# Altium PCB OBC_v8.PcbDoc (part 2 of 3)
Units mil, origin at the board's own origin, x right, y up, seen from the top; angles counter-clockwise.
Board outline 3550 x 3775 mil, 6 copper layers (Top Layer, MidLayer1, GND, Power, MidLayer2, Bottom Layer); 109 components, 228 nets, 761 pads, 520 vias.
Unrouted connection lines stored in the file: 5.
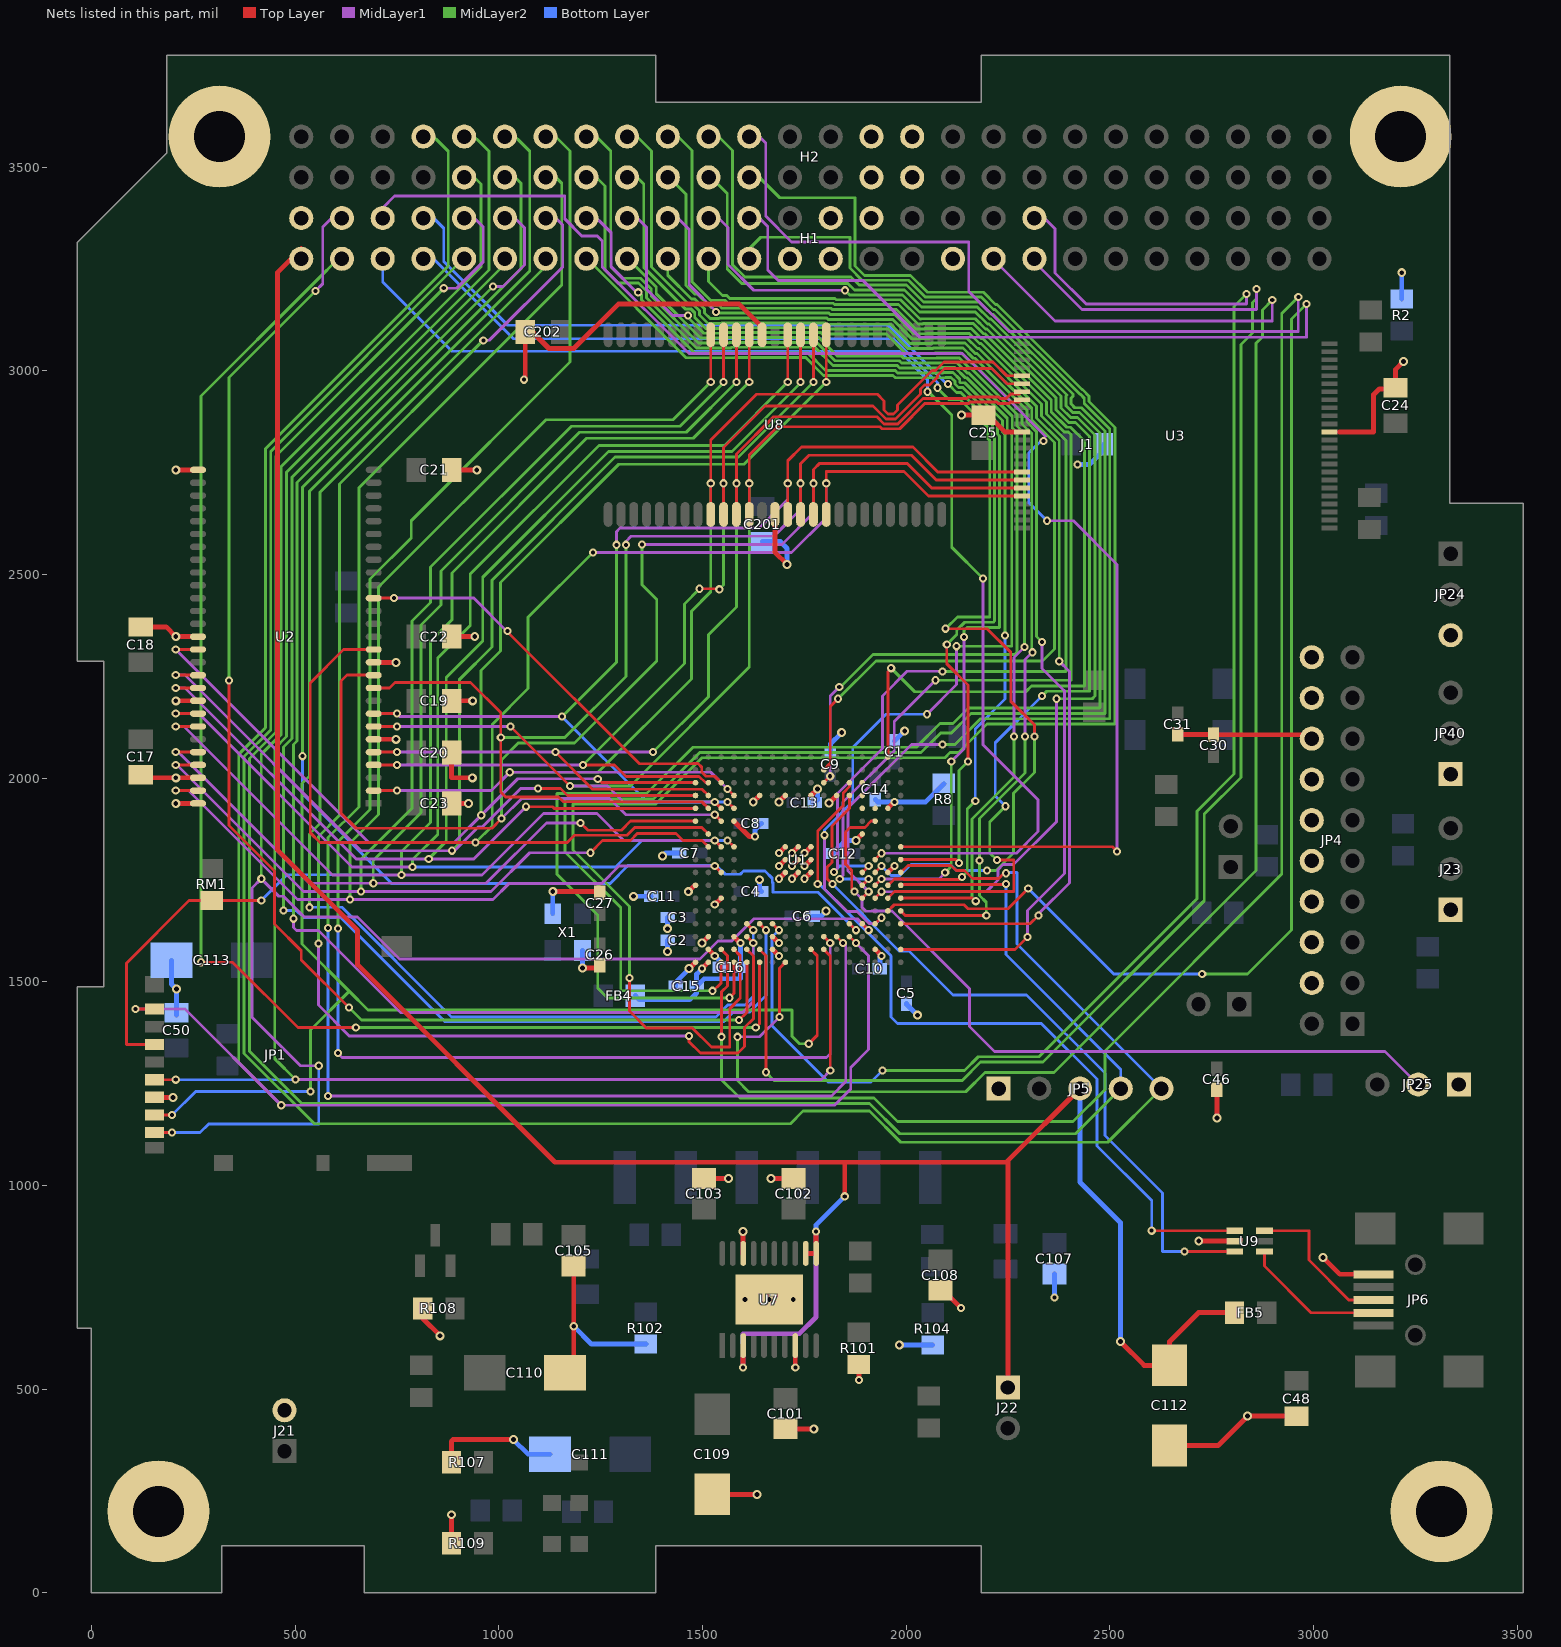
[diagram p6: the nets of this part, all layers, seen from the top]

## Via types
v1: diameter 20, hole 10, Top Layer to Bottom Layer, 405 vias
v2: diameter 22, hole 12, Top Layer to Bottom Layer, 93 vias
v3: diameter 20, hole 10, Top Layer to MidLayer1, 22 vias

## Nets (pads, with @x,y where several pads share a name; then routed paths per layer and width w, separated by ;. In a path a pad name is that pad's centre, name@x,y a point inside that pad or via, vN(x,y) a via of type N, cw(c..) or ccw(c..) an arc to the next point about the centre after c; other vN are vias at no path point) (continued)
AGND: C1.1 C2.1 C3.1 C4.1 C5.1 C6.1 C7.1 C8.1 C9.1 C10.1 C11.1 C12.1 C13.1 C14.1 C15.1 C16.1 C17.1 C18.1 C19.1 C20.1 C21.1 C22.1 C23.1 C24.2 C25.1 C26.1 C27.1 C30.1 C31.1 C46.1 C48.1 C50.1 C101.2 C102.2 C103.2 C105.1 C107.1 C108.1 C109.2 C110.2 C111.2 C112.2 C113.2 C201.2 C202.1 H1.2 H1.30 H2.29 H2.30 H2.31 H2.32 J1.2 J21.2 J23.1 JP1.6 JP4.4 JP4.6 JP4.8 JP4.10 JP4.12 JP4.14 JP4.16 JP4.18 JP4.20 JP5.1 JP6.5 JP24.3 JP25.1 JP40.1 pad.1 pad.2 pad.3 pad.4 R2.1 R8.1 R101.1 R102.1 R104.1 R107.1 R108.1 R109.1 U1.D6 U1.D8 U1.D10 U1.D12 U1.E16 U1.F4 U1.G14 U1.H8 U1.H9 U1.H10 U1.J8 U1.J9 U1.J10 U1.K8 U1.K9 U1.K10 U1.K16 U1.L1 U1.M3 U1.R2 U1.R7 U1.T2 U1.T7 U1.T15 U1.U1 U2.6 U2.12 U2.28 U2.41 U2.46 U2.52 U2.54 U3.13 U3.36 U7.8 U7.18 U7.21 U8.14 U8.42 U9.GND X1.2 X1.4 | length 6989.8
  Top Layer w12: C18.1@121,2371.31 183.14,2371.31 v2(207,2347.45) U2.41@261.5,2347.45 ; C17.1@124,2008.69 131.7,2000.99 v2(207,2000.99) U2.52@261.5,2000.99 ; JP1.6@155,1216.46 v2(200,1216.47) ; v2(207,1938) U2.54@261.5,1938 ; v2(207,2189.97) U2.46@261.5,2189.97 ; v2(207,2756.9) U2.28@261.5,2756.9 ; U2.6@693,2095.48 v2(748,2095.48) ; U2.12@693,2284.46 v2(748,2284.46) ; R108.1@813.63,698 813.63,673.37 v2(856,631) ; R109.1@883.63,122 v2(883.63,191.63) v2@884,192 ; R107.1@883.63,320 883.63,371.63 888,376 v2(1036,376) ; C23.1@884.31,1938 v2(926,1938) ; C20.1@884.31,2062.99 884.31,2000.99 v2(935,2000.99) ; C19.1@884.31,2189.97 v2(936,2189.97) ; C22.1@884.31,2347.45 v2(941,2347.45) ; C21.1@884.31,2756.9 v2@946,2756.9 ; v1@1064.96,2981.3 C202.1@1064.96,3095.47 1082.87,3095.47 1123.4,3054.94 1184.47,3054.94 1293.36,3163.84 1590.19,3163.84 1646.5,3107.53 U8.42@1646.5,3088.47 U8.42@1648.03,3090 ; v2(1132.58,1721.58) 1245.01,1721.58 C27.1@1248,1718.59 ; C110.2@1162.43,540 C110.2@1184.59,560.96 ; C110.2@1184,561.57 v1(1184,654.41) C105.1@1184,802.6 ; v2(1205.42,1533.58) 1241.17,1533.58 C26.1@1248,1540.41 ; v2(1465.28,1721.26) 1481.03,1737.01 U1.L1@1483.03,1737.01 ; v2(1467.28,1532.28) U1.U1@1483.03,1548.03 ; v2(1498.78,1595.28) U1.R2@1514.53,1611.02 ; C103.2@1504,1017.4 v2@1564,1017.4 ; U1.T2@1514.53,1579.53 v1(1530.28,1563.78) ; C109.2@1524,241.57 v2(1633.57,241.57) ; v1(1530.28,1689.76) U1.M3@1546.02,1705.51 ; U1.F4@1577.52,1894.49 1615.27,1856.74 v1(1629.27,1856.74) ; U7.18@1600.02,833.19 v2(1600.02,887) ; v2(1624.76,1941.73) U1.D6@1640.51,1957.48 ; v2(1668.4,1017.4) C102.2@1724,1017.4 ; U1.T7@1672.01,1579.53 v1(1687.76,1563.78) ; U1.R7@1672.01,1611.02 v1(1687.76,1595.28) ; U8.14@1678,2647.53 1678,2555 v2(1708,2525) ; v2(1687.76,1941.73) U1.D8@1703.5,1957.48 ; v1(1688.01,1753.01) U1.K8@1703.5,1768.5 ; v1(1688.01,1784) 1688.01,1784.5 U1.J8@1703.5,1800 ; v1(1688.01,1816) U1.H8@1703.5,1831.5 ; C101.2@1704,402.6 v2(1773.4,402.6) ; v1(1720.01,1753.01) 1720.01,1753.51 U1.K9@1735,1768.5 ; v1(1720.01,1784) 1720.01,1785.01 U1.J9@1735,1800 ; v1(1720.01,1816) 1720.01,1816.5 U1.H9@1735,1831.5 ; v1(1728,553) U7.8@1727.98,606.81 ; v1(1751,1753.01) U1.K10@1766.5,1768.5 ; v1(1751,1784.5) U1.J10@1766.5,1800 ; v1(1751,1816) U1.H10@1766.5,1831.5 ; U1.D10@1766.5,1957.48 v2(1782.24,1973.23) ; v2(1810.74,1938.73) U1.D12@1829.49,1957.48 ; v2(1876.73,1847.24) U1.G14@1892.48,1862.99 ; v1(1884,522) R101.1@1884,560.63 R101.1@1884,574.41 ; U1.T15@1923.98,1579.53 v1(1939.72,1563.78) ; U1.K16@1955.47,1768.5 v1(1971.22,1784.25) ; U1.E16@1955.47,1925.98 v1(1971.22,1941.73) ; C108.1@2084,742.6 2091.4,742.6 v1(2135,699) ; v2(2136,2891.31) C25.1@2190,2891.31 ; C25.1@2197,2883.59 2209,2883.59 2242.37,2850.22 U3.36@2284.09,2850.22 ; C112.2@2647,361.57 2766.19,361.57 v2(2838.31,433.69) C48.1@2959,433.69 ; C31.1@2667,2107.41 C30.1@2751.18,2107.41 ; v2(2718.59,863.41) U9.GND@2807,863.41 ; C30.1@2755,2106.59 2986.41,2106.59 JP4.16@2996,2097 ; v2(2763,1166) C46.1@2763,1235.41 ; v2(3024,823) 3065.02,781.98 JP6.5@3148,781.98 ; 3064,2850.22 3148,2850.22 3148,2942 3161.59,2955.59 C24.2@3188,2955.59 ; C24.2@3202,2958.31 3202,3004 v2(3221,3023)
  Bottom Layer w12: C113.2@196.57,1553 196.57,1494.43 v2(209,1482) C50.1@209,1424.31 C50.1@209,1418.59 ; v2(1036,376) 1072,340 C111.2@1125.57,340 ; X1.4@1132.58,1667.28 v2(1132.58,1721.58) ; v1(1184,654.41) 1227.78,610.63 R102.1@1361,610.63 ; v2(1205.42,1533.58) X1.2@1205.42,1576.72 ; v2(1331,1710) C11.1@1374.41,1710 ; v2(1402,1809) 1409,1816 C7.1@1443.41,1816 ; v2(1414.41,1574.41) C2.1@1414.41,1602 ; v2(1414.41,1630.41) C3.1@1414.41,1658 ; C2.1@1416.41,1602 C2.1@1416.41,1605 ; C15.1@1434.41,1489 1434.41,1499.41 v2(1467.28,1532.28) ; v1(1530.28,1563.78) 1542.41,1551.65 C16.1@1542.41,1536 ; v1(1629.27,1856.74) 1629.27,1873.68 C8.1@1644.59,1889 ; v2(1640.59,1750.59) 1640.59,1726 C4.1@1644.59,1722 ; C201.2@1647,2580.69 1691.31,2580.69 1708,2564 v2(1708,2525) ; C6.1@1770.59,1661 1791,1661 1803,1673 v2(1803,1674) ; C13.1@1775.59,1940 1782.24,1946.65 v2(1782.24,1973.23) ; C9.1@1814,2059.59 1814,2084 v2(1842,2112) ; C12.1@1819.41,1815 1851.65,1847.24 v2(1876.73,1847.24) ; C14.1@1924.18,1947.64 1930.09,1941.73 v1(1971.22,1941.73) 2048.36,1941.73 R8.1@2093,1986.37 ; C10.1@1935.59,1532 1935.59,1559.65 v1(1939.72,1563.78) ; C1.1@1971.22,2090.59 v2(1996.63,2116) ; v2(1983.37,608.63) R104.1@2065,608.63 ; C5.1@2001,1446.41 2001,1445 v2(2028,1418) ; v1(2364,725) C107.1@2364,782.6 ; v1(2421,2770) 2450,2770 2484.37,2804.37 J1.2@2484.37,2819.85 ; JP4.4@2979,1480 JP4.4@2996,1497 ; R2.1@3217,3176.37 v2(3217,3241)
  other v1: 1062.01,2978.35
  other v2: 1604.94,720 1664,720 1723.06,720 1564,1017 946,2757
AVDD: C15.2 C16.2 FB4.2 U1.R4 U1.U2 | length 474.3
  Top Layer w12: v1(1498.78,1532.28) U1.U2@1514.53,1548.03 ; U1.R4@1577.52,1611.02 v1(1593.27,1595.28)
  Bottom Layer w12: FB4.2@1335.37,1466 1345.37,1456 1469,1456 1485.59,1472.59 C15.2@1485.59,1489 ; v1(1498.78,1532.28) 1485.59,1519.09 C15.2@1485.59,1489 ; C16.2@1593.27,1536 v1(1593.27,1595.28) ; C16.2@1593.59,1536 1593.59,1507.59 1504.18,1507.59 C15.2@1485.59,1489
AVDD33: 
BMS: JP25.2 U1.F15 | length 1886.7
  Top Layer w7: v1(1873,1722) 1866.74,1728.26 1866.74,1772.97 1851,1788.71 1851,1868 1862.1,1879.1 1898.85,1879.1 1914.24,1894.49 U1.F15@1923.98,1894.49 U1.F15@1923.98,1894.98
  MidLayer1 w7: v1(1873,1722) 1891.73,1703.27 1891.73,1682.93 1901.39,1673.26 1915.06,1673.26 1915.57,1673.77 1965.23,1673.77 2156,1483 2156,1390 2217,1329 3176,1329 JP25.2@3257,1248
CAS: U1.C3 U2.17 | length 1047.9
  Top Layer w7: U2.17@693,2441.94 v1(743,2441.94) ; v1@1020.5,2360.5 1345.4,2035.6 1476.4,2035.6 1476.66,2035.86 1489.41,2035.86 1498.42,2026.85 1498.42,2014.81 1508.51,2004.72 1530.28,2004.72 U1.C3@1546.02,1988.98
  MidLayer1 w7: v1(743,2441.94) 939.06,2441.94 v1@1020.5,2360.5
  other v1: 1021,2361
"CTS MHX": H1.35 U1.U8 | length 4122.5
  Top Layer w7: v1(1689,1414) 1689,1533.53 U1.U8@1703.5,1548.03
  MidLayer1 w7: v1(1586,1365) 1640,1365 v1(1689,1414) ; H1.35@2215,3300 2215,3273.19 2365.69,3122.5 2899,3122.5 v1(2899,3174)
  MidLayer2 w7: v1(1586,1365) 1586,1257.5 1613.5,1230 2146.51,1230 2193.54,1277.03 2363.1,1277.03 2859,1772.92 2859,3067.69 2874.75,3083.44 2874.75,3149.75 v1(2899,3174)
D0: U1.D4 U2.2 U3.29 U8.9 | length 3068
  Top Layer w7: U2.2@693,1969.5 v1(750,1969.5) ; U8.9@1520.52,2647.53 v1(1520.52,2724) 1520.52,2830 1633,2942.48 1929.89,2942.48 1946.1,2926.27 1946.1,2903.6 1955.76,2893.93 1969.43,2893.93 1979.1,2903.6 1979.1,2916.11 2063.49,3000.5 2071.83,3000.5 2092.99,3021.65 2213.58,3021.65 2247.22,2988.02 U3.29@2284.09,2988.02 ; v3(1561.77,1973.23) U1.D4@1577.52,1957.48
  MidLayer1 w7: v1(750,1969.5) 982,1969.5 v1(1027,2014.5) 1520.5,2014.5 v3(1561.77,1973.23)
  MidLayer2 w7: v1(1027,2014.5) 1244,2014.5 1473,2243.5 1473,2410 1520.52,2457.52 v1(1520.52,2724)
D1: U1.C2 U2.4 U3.30 U8.10 | length 2736.3
  Top Layer w7: U2.4@693,2032.49 v1(750,2032.49) ; v1(1207,2032.49) 1284,2032.49 1312.12,2004.37 1491.9,2004.37 1507.29,1988.98 U1.C2@1514.53,1988.98 ; v1(1493,2465) 1543,2465 1541.7,2463.7 v1(1541.41,2463.7) ; U8.10@1552.02,2647.53 v1(1552.02,2724) 1552.02,2812 1654.03,2914.02 1918.71,2914.02 1950.79,2881.93 1974.4,2881.93 2035.67,2943.2 2035.67,2955.65 2045.33,2965.32 2057.79,2965.32 2076.81,2984.33 2076.81,2988.5 2094.21,3005.91 2210.46,3005.91 2248.03,2968.33 U3.30@2284.09,2968.33
  MidLayer1 w7: v1(750,2032.49) v1(1207,2032.49)
  MidLayer2 w7: v1(1207,2032.49) 1456,2281.49 1456,2428 v1(1493,2465) ; v1(1541.41,2463.7) 1541.7,2463.7 1552.02,2474.02 v1(1552.02,2724)
D2: U1.D2 U2.5 U3.31 U8.11 | length 2779.8
  Top Layer w7: U2.5@693,2063.98 v1(750,2063.98) ; v1(1139.02,2063.98) 1230.13,1972.87 1499.14,1972.87 U1.D2@1514.53,1957.48 ; U8.11@1583.51,2647.53 v1(1583.51,2724) 1583.51,2796 1675.02,2887.51 1928.24,2887.51 1945.82,2869.93 1979.37,2869.93 2041.76,2932.32 2148.87,2932.32 2151.98,2935.43 2228.02,2935.43 2231.13,2932.32 2245.9,2932.32 2256.95,2943.37 2278.81,2943.37 U3.31@2284.09,2948.65
  MidLayer1 w7: v1(750,2063.98) v1(1139.02,2063.98) v1(1378.98,2063.98)
  MidLayer2 w7: v1(1378.98,2063.98) 1515,2200 1515,2352 1583.51,2420.51 v1(1583.51,2724)
D3: U1.E3 U2.7 U3.32 U8.12 | length 2826
  Top Layer w7: U2.7@693,2126.98 v1(750,2126.98) ; v1(1028.98,2126.98) v1(1175.08,1981.07) ; v3(1530.28,1941.73) U1.E3@1546.02,1925.98 ; U8.12@1615.01,2647.53 v1(1615.01,2724) 1615.01,2793.5 1684.5,2862.99 1935.79,2862.99 1940.85,2857.93 1984.34,2857.93 2046.73,2920.32 2153.84,2920.32 2156.95,2923.43 2223.05,2923.43 2226.16,2920.32 2253.59,2920.32 2256.95,2923.68 2278.81,2923.68 U3.32@2284.09,2928.96
  MidLayer1 w7: v1(750,2126.98) v1(1028.98,2126.98) ; v1(1175.08,1981.07) 1266.59,1981.07 1305.93,1941.73 v3(1530.28,1941.73)
  MidLayer2 w7: v1(1175.08,1981.07) 1323,1981.07 1615.01,2273.08 v1(1615.01,2724)
D4: U1.E4 U2.8 U3.41 U8.15 | length 2729.1
  Top Layer w7: U2.8@693,2158.47 v1(750,2158.47) ; v1(1561.77,1941.73) U1.E4@1577.52,1925.98 ; U8.15@1709.5,2647.53 v1(1709.5,2724) 1709.5,2779.5 1743,2813 2016.67,2813 2077.87,2751.8 U3.41@2284.09,2751.8
  MidLayer1 w7: v1(750,2158.47) 757.47,2151 v1(1155.47,2151) ; v1(1289,2573) 1289,2605 1298,2614 1639.5,2614 1709.5,2684 v1(1709.5,2724)
  MidLayer2 w7: v1(1155.47,2151) 1289,2284.53 v1(1289,2573)
  Bottom Layer w7: v1(1155.47,2151) 1364.74,1941.73 v1(1561.77,1941.73)
D5: U1.E2 U2.10 U3.42 U8.16 | length 3000.2
  Top Layer w7: U2.10@689.53,2221.46 U2.10@693,2221.46 731.46,2221.46 745,2235 931,2235 1005,2161 v1(1005,2100) 1005,1966 1017,1954 1147,1954 1159,1942 1498.51,1942 U1.E2@1514.53,1925.98 ; U8.16@1740.99,2647.53 v1(1740.99,2724) 1740.99,2771.99 1762,2793 2013.11,2793 2074,2732.11 U3.42@2284.09,2732.11
  MidLayer1 w7: v1(1312,2573) 1312,2581 1325,2594 1675,2594 1740.99,2659.99 v1(1740.99,2724)
  MidLayer2 w7: v1(1005,2100) 1162,2100 1312,2250 v1(1312,2573)
D6: U1.F3 U2.11 U3.43 U8.17 | length 3517.5
  Top Layer w7: U2.11@693,2252.96 627.04,2252.96 613,2238.92 613,1914 650,1877 983,1877 v1(1007,1901) ; v3(1530.28,1910.24) U1.F3@1546.02,1894.49 ; U8.17@1772.49,2647.53 v1(1772.49,2724) 1772.49,2757.49 1788,2773 2002.43,2773 2063,2712.43 U3.43@2284.09,2712.43
  MidLayer1 w7: v1(1007,1901) 1056.5,1950.5 1271.74,1950.5 1312,1910.24 v3(1530.28,1910.24) ; v1(1352,2574) 1695,2574 1772.49,2651.49 v1(1772.49,2724)
  MidLayer2 w7: v1(1007,1901) 1007,2045 1048,2086 1186,2086 1388,2288 1388,2439 1352,2475 v1(1352,2574)
D7: U1.G2 U2.13 U3.44 U8.18 | length 3702.4
  Top Layer w7: U2.13@693,2315.95 618.95,2315.95 537,2234 537,1866 561,1842 v1(943,1842) 1168,1842 1186,1860 1315,1860 1334,1879 1498.52,1879 U1.G2@1514.53,1862.99 ; U8.18@1803.98,2647.53 v1(1803.98,2724) 1803.98,2753 1995,2753 2055.26,2692.74 U3.44@2284.09,2692.74
  MidLayer1 w7: v1(1231,2554) 1719,2554 1803.98,2638.98 v1(1803.98,2724)
  MidLayer2 w7: v1(943,1842) 984,1883 984,2132 1072,2220 1072,2395 v1(1231,2554)
D8: U1.C1 U2.42 U8.37 | length 3307
  Top Layer w7: v1(207,2315.95) U2.42@261.5,2315.95 ; v1(1243,1998) 1252.02,1988.98 U1.C1@1483.03,1988.98 ; v1(1803.98,2972.44) U8.37@1803.98,3088.47
  MidLayer1 w7: v1(207,2315.95) 680.95,1842 890,1842 v1(957,1909) 1046.57,1998.57 1241.43,1998.57 v1@1243,1997
  MidLayer2 w7: v1(957,1909) 956.5,1909.5 956.5,2264.5 1004.5,2312.5 1004.5,2480.5 1294.67,2770.67 1602.21,2770.67 v1(1803.98,2972.44)
D9: U1.D1 U2.44 U8.38 | length 3391.3
  Top Layer w7: v1(207,2252.96) U2.44@261.5,2252.96 ; v1(1096,1975) 1151.48,1975 1169,1957.48 U1.D1@1483.03,1957.48 ; v1(1772.49,2972.44) U8.38@1772.49,3088.47
  MidLayer1 w7: v1(207,2252.96) 230.04,2252.96 661,1822 v1(885,1822) 891,1822 949.5,1880.5 959.5,1880.5 1054,1975 v1(1096,1975)
  MidLayer2 w7: v1(885,1822) 904,1841 904,2243 983,2322 983,2486 1285.39,2788.39 1588.43,2788.39 v1(1772.49,2972.44)
D10: U1.E1 U2.45 U8.39 | length 3400.9
  Top Layer w7: v1(207,2221.47) U2.45@261.5,2221.46 ; v1(1067,1930) 1132,1930 1136.02,1925.98 U1.E1@1483.03,1925.98 ; v1(1740.99,2972.44) U8.39@1740.99,3088.47
  MidLayer1 w7: v1(207,2221.47) 230,2221.47 649.47,1802 v1(828,1802) 939,1802 v1(1067,1930)
  MidLayer2 w7: v1(828,1802) 871,1845 871,2247 960.5,2336.5 960.5,2493.5 1269,2802 1572.67,2802 v1@1742.05,2971.38
D11: U1.H4 U2.47 U8.40 | length 3483.1
  Top Layer w7: v1(207,2158.47) U2.47@261.5,2158.47 ; v1(1561.77,1847.24) U1.H4@1577.52,1831.5 ; v1(1709.5,2972.44) U8.40@1709.5,3088.47
  MidLayer1 w7: v1(207,2158.47) 263.53,2158.47 640,1782 v1(788,1782)
  MidLayer2 w7: v1(788,1782) 788,1800 850,1862 850,2295 930,2375 930,2501 1245.93,2816.93 1553.98,2816.93 v1(1709.5,2972.44)
  Bottom Layer w7: v1(788,1782) 1286.76,1782 1352,1847.24 v1(1561.77,1847.24)
D12: U1.H3 U2.48 U8.43 | length 3474.5
  Top Layer w7: v1(207,2126.98) U2.48@261.5,2126.98 ; v3(1530.28,1847.24) U1.H3@1546.02,1831.5 ; v1(1615.01,2972.44) U8.43@1615.01,3088.47
  MidLayer1 w7: v1(207,2126.98) 227,2126.98 591.98,1762 v1(761,1762) 959,1762 1110,1913 1241,1913 1306.76,1847.24 v3(1530.28,1847.24)
  MidLayer2 w7: v1(761,1762) 761,1820 832,1891 832,2336 885,2389 885,2504 1215.65,2834.65 1477.36,2834.65 v1@1615.08,2972.37
D13: U1.F1 U2.50 U8.44 | length 3411.2
  Top Layer w7: v1(207,2063.98) U2.50@261.5,2063.98 ; v1(1201,1890) 1219,1872 1301,1872 1323.49,1894.49 U1.F1@1483.03,1894.49 ; v1(1583.51,2972.44) U8.44@1583.51,3088.47
  MidLayer1 w7: v1(207,2063.98) 213,2063.98 534.98,1742 v1(692,1742) 969,1742 1117,1890 v1(1201,1890)
  MidLayer2 w7: v1(692,1742) 692,1798 809,1915 809,2376 858,2425 858,2509 1198.41,2849.41 1460.48,2849.41 v1(1583.51,2972.44)
D14: U1.H2 U2.51 U8.45 | length 3451
  Top Layer w7: v1(207,2032.49) U2.51@261.5,2032.49 ; v1(1225,1817) 1255,1847 1323,1847 1340,1864 1435,1864 1452,1847 1499.02,1847 U1.H2@1514.53,1831.5 ; v1(1552.02,2972.44) U8.45@1552.02,3088.47
  MidLayer1 w7: v1@210,2032.49 520.49,1722 v1(662,1722) 981,1722 1076,1817 v1(1225,1817)
  MidLayer2 w7: v1(662,1722) 662,1801 787,1926 787,2386 832.5,2431.5 832.5,2518.5 1178.17,2864.17 1444.88,2864.17 v1@1552.58,2971.87
D15: U1.K3 U2.53 U8.46 | length 3481
  Top Layer w7: v1(207,1969.5) U2.53@261.5,1969.5 ; v1(1520.52,2972.44) U8.46@1520.52,3088.47 ; v3(1530.28,1784.25) U1.K3@1546.02,1768.5
  MidLayer1 w7: v1(207,1969.5) 238.5,1969.5 506,1702 v1(635,1702) 985.5,1702 1024.5,1741 1252,1741 1295.25,1784.25 v3(1530.28,1784.25)
  MidLayer2 w7: v1(635,1702) 635,1841 705,1911 705,2469 1115.92,2879.92 1428.15,2879.92 v1@1520.59,2972.37
DDM: U1.D13 U9.D2 | length 1780.9
  Top Layer w7: v1(1819,1740) 1806.5,1752.5 1806.5,1781.83 1818,1793.33 1818,1883 1860.98,1925.98 U1.D13@1860.98,1957.48 ; v1(2684,837.82) U9.D2@2807,837.82
  Bottom Layer w7: v1(1819,1740) 1983,1576 2007,1576 2115,1468 2296,1468 2488,1276 2488,1123 2629.18,981.82 2629.18,837.82 v1(2684,837.82)
DDP: U1.C13 U9.D1 | length 1885
  Top Layer w7: v1(1783,1740) 1783,1870 1845.59,1932.59 1845.59,1963.85 1860.98,1979.24 U1.C13@1860.98,1988.98 ; v1(2603,889) 2684,889 U9.D1@2807,889
  Bottom Layer w7: v1(1783,1740) 1786.84,1740 1963,1563.84 1963,1414 1979,1398 2332.03,1398 2469,1261.03 2469,1097 2603,963 v1(2603,889)
"DSR MHX": H1.37 U1.T6 | length 3806.3
  Top Layer w7: U1.T6@1640.51,1579.53 1656,1564.04 v1(1656,1278)
  MidLayer1 w7: H1.37@2315,3300 2315,3267.68 2432.18,3150.5 2860,3150.5 v1(2860,3201)
  MidLayer2 w7: v1(1656,1278) 1676,1258 2137.74,1258 2182.77,1303.03 2336.03,1303.03 2732,1699 2732,1912 2822,2002 2822,3064.63 2850.75,3093.39 2850.75,3167.75 2860,3177 v1(2860,3201)
"DTR MHX": H1.38 U1.P7 | length 3793.1
  Top Layer w7: U1.P7@1672.01,1642.52 v1(1687.76,1626.77)
  MidLayer1 w7: H1.38@2315,3400 2366,3349 2366,3240.3 2442.45,3163.85 2835,3163.85 2836,3164.85 v1(2836,3189)
  MidLayer2 w7: v1(1942,1282) 2143.36,1282 2177.38,1316.03 2326.03,1316.03 2714,1704 2714,1919 2805,2010 2805,3158 v1(2836,3189)
  Bottom Layer w7: v1(1687.76,1626.77) 1671,1610.02 1671,1392 1809,1254 1914,1254 v1(1942,1282)
E-GND: 
EXTPWR: H1.27 H1.28 H1.33
FAULT: H1.25
HDM: JP6.2 U9.D3 | length 351.3
  Top Layer w7: U9.D3@2879.83,837.82 2879.83,802.17 2994.5,687.5 JP6.2@3148,687.5
HDMA: U1.E15
HDMB: U1.C14 | length 0
HDP: JP6.3 U9.D4 | length 380.8
  Top Layer w7: U9.D4@2879.83,889 2988.99,889 2988.99,817.01 3087.01,718.99 JP6.3@3148,718.99
HDPA: U1.E14
HDPB: U1.D14
INTRP: 
IO0: H1.24 U1.N16 | length 4348.9
  Top Layer w7: U1.N16@1955.47,1674.02 1970.86,1689.41 2142,1689.41 2151.91,1679.5 2250.5,1679.5 v1(2300,1729)
  MidLayer1 w7: H1.24@1615,3400 1660.5,3354.5 1660.5,3247.96 1687.01,3221.46 1894.68,3221.46 2033.64,3082.5 2983,3082.5 v1(2983,3164)
  MidLayer2 w7: v1(2727.03,1519.03) 2838,1519.03 2946,1627.03 2946,3127 v1(2983,3164)
  Bottom Layer w7: v1(2300,1729) 2509.97,1519.03 v1(2727.03,1519.03)
IO1: H1.23 U1.M14 | length 2836.6
  Top Layer w7: U1.M14@1892.48,1705.51 v1(1908.23,1721.26)
  MidLayer1 w7: 1891.73,1961.73 1857.5,1927.5 1857.5,1771.99 v1(1908.23,1721.26) ; 1892,1961.73 2013.27,2083 v1(2089,2083)
  MidLayer2 w7: H1.23@1615,3300 1643,3328 1862,3328 1862,3252.17 1891.62,3222.55 2006.22,3222.55 2047.83,3180.94 2184.79,3180.94 2214.73,3151 2218.6,3151 2427.1,2942.5 2427.83,2942.5 2437.5,2932.83 2437.5,2919.57 2500,2857.07 2500,2147 2499,2146 2183,2146 2120,2083 v1(2089,2083)
IO2: H1.22 U1.M15 | length 2828.1
  Top Layer w7: U1.M15@1923.98,1705.51 v1(1939.72,1721.26)
  MidLayer1 w7: H1.22@1515,3400 1563,3352 1563,3261 1626.17,3197.83 v1(1850.39,3197.83) ; v1(1939.72,1721.26) 2197,1721.26 2225.5,1749.76 2225.5,1775.34 2238.08,1787.92 2263.92,1787.92 2369,1893 v1(2369,2195)
  MidLayer2 w7: v1(1850.39,3197.83) 1861.68,3186.55 1991.31,3186.55 2032.92,3144.94 2169.88,3144.94 2199.82,3115 2203.69,3115 2380.5,2938.19 2380.5,2909.22 2404.22,2885.5 2420.66,2885.5 2464,2842.16 2464,2202 2457,2195 v1(2369,2195)
IO3: H1.21 U1.M16 | length 2857.4
  Top Layer w7: U1.M16@1955.47,1705.51 1971.58,1721.62 2264.2,1721.62 2264.2,1798.8 2264,1799 v1(2223,1799)
  MidLayer2 w7: H1.21@1515,3300 1515,3219.25 1548.91,3185.34 1559.69,3185.34 1567.15,3177.88 1825.52,3177.88 1828.85,3174.55 1986.33,3174.55 2033.88,3127.01 2035.85,3127.01 2036.87,3128.02 2169.83,3128.02 2194.85,3103 2198.72,3103 2368.5,2933.22 2368.5,2904.25 2399.25,2873.5 2415.69,2873.5 2450,2839.19 2450,2213.5 2345.5,2213.5 v1(2334,2202) v1@2332,2202 ; v1(2223,1799) 2205.56,1816.44 2205.56,1892.56 v1(2244,1931)
  Bottom Layer w7: v1(2244,1931) 2219,1956 2219,2087 v1(2334,2202)
IO4: H1.20 U1.K14 | length 2951
  Top Layer w7: U1.K14@1892.48,1768.5 v1(1908.23,1784.25)
  MidLayer1 w7: H1.20@1415,3400 1467.5,3347.5 1467.5,3211.63 1534.3,3144.84 v1(1533.54,3144.84) ; v1(1823,1770) 1831.24,1778.24 1831.24,1962.24 1942,2073 1942,2202 2002.5,2262.5 2088,2262.5 v1(2089,2261.5)
  MidLayer2 w7: v1(1533.54,3144.84) 1534.3,3144.84 1537.25,3141.88 1810.61,3141.88 1813.94,3138.55 1971.42,3138.55 2018.97,3091.01 2050.77,3091.01 2051.78,3092.02 2154.92,3092.02 2179.94,3067 2183.81,3067 2332.5,2918.31 2332.5,2889.34 2392.5,2829.34 2392.5,2262 2392,2261.5 v1(2089,2261.5)
  Bottom Layer w7: v1(1823,1770) 1837.25,1784.25 v1(1908.23,1784.25)
IO5: H1.19 U1.P17 | length 2773.7
  Top Layer w7: U1.P17@1986.97,1642.52 2304.52,1642.52 v1(2325,1663)
  MidLayer1 w7: v1(2325,1663) 2325,1667 2401,1743 2401,2262 v1(2376,2287)
  MidLayer2 w7: H1.19@1415,3300 1415,3234.61 1473.28,3176.33 1481.34,3176.33 1505.07,3152.6 1505.07,3142.38 1519.11,3128.34 1540.37,3128.34 1541.92,3129.88 1805.64,3129.88 1808.97,3126.55 1966.45,3126.55 2014,3079.01 2055.74,3079.01 2056.75,3080.02 2149.94,3080.02 2174.96,3055 2178.84,3055 2320.5,2913.34 2320.5,2884.37 2376,2828.87 v1(2376,2287)
IO6: H1.18 U1.N17 | length 2791.3
  Top Layer w7: U1.N17@1986.97,1674.02 1997.98,1663 v1(2197,1663)
  MidLayer1 w7: H1.18@1315,3400 1362.5,3352.5 1362.5,3200.49 1427.17,3135.83 v1(1464.57,3135.83) ; v1(2292,2102) 2292,2291 v1(2310,2309)
  MidLayer2 w7: v1@1462.11,3133.37 1503.13,3092.34 1555.29,3092.34 1556.83,3093.88 1790.73,3093.88 1794.06,3090.55 1951.54,3090.55 1999.08,3043.01 2070.65,3043.01 2071.66,3044.02 2135.03,3044.02 2160.05,3019 2163.93,3019 2284.5,2898.43 2284.5,2869.46 2308.5,2845.46 2308.5,2310.5 v1(2310,2309) ; v1(2197,1663) 2197,1695.33 2180,1712.33 v1(2180,1798) 2180,1901 2292,2013 v1(2292,2102)
IO7: H1.17 U1.M17 | length 2598.2
  Top Layer w7: U1.M17@1986.97,1705.51 2163.49,1705.51 v1(2171,1698)
  MidLayer1 w7: v1(2265.01,2102) 2265.01,2296.01 v1(2291,2322)
  MidLayer2 w7: H1.17@1315,3300 1315,3277.71 1386.5,3206.21 1386.5,3189.53 1495.69,3080.34 1560.26,3080.34 1561.8,3081.88 1785.76,3081.88 1823.09,3044.55 1830.7,3036.94 1988.18,3036.94 1994.11,3031.01 2075.62,3031.01 2076.63,3032.02 2130.06,3032.02 2155.08,3007 2158.96,3007 2272.5,2893.46 2272.5,2864.49 2291,2845.99 v1(2291,2322) ; v1(2171,1698) 2162.03,1706.97 2162.03,1900 2265.01,2002.99 v1(2265.01,2102)
IO8: H1.16 U1.L16 | length 2662.9
  Top Layer w7: U1.L16@1955.47,1737.01 1971.22,1752.76 1992.98,1752.76 1994.24,1751.5 2131.5,1751.5 v1(2137,1757)
  MidLayer1 w7: H1.16@1215,3400 1275.97,3339.03 1275.97,3255.52 1335.98,3195.52 1342.52,3195.52 v1(1342.52,3192.91)
  MidLayer2 w7: v1(1342.52,3192.91) 1342.52,3195.52 1350.5,3187.54 1350.5,3174.61 1480.78,3044.34 1575.17,3044.34 1575.31,3044.48 1758.58,3044.48 1802.12,3000.94 1815.79,3000.94 1973.27,3000.94 1979.2,2995.01 2090.53,2995.01 2091.54,2996.02 2115.15,2996.02 2131.85,2979.32 2131.85,2972.96 2133.81,2971 2144.04,2971 2236.5,2878.54 2236.5,2849.58 2243,2843.08 v1(2243,2350) ; v1(2137,1757) 2150.03,1770.03 2150.03,1924.03 v1(2170,1944)
  Bottom Layer w7: v1(2170,1944) 2170,2121 2243,2194 v1(2243,2350)
IO9: H1.15 U1.L15 | length 2598.5
  Top Layer w7: U1.L15@1923.98,1737.01 v1(1939.72,1752.76)
  MidLayer1 w7: v1(1939.72,1752.76) 2080.76,1752.76 v1(2096,1768) ; v1(2111,2041) 2142,2072 v1(2142,2347)
  MidLayer2 w7: H1.15@1215,3300 1215,3277.03 1459.69,3032.34 1580.14,3032.34 1580.28,3032.48 1753.61,3032.48 1797.15,2988.94 1810.82,2988.94 1968.3,2988.94 1974.23,2983.01 2095.5,2983.01 2096.51,2984.02 2110.18,2984.02 2119.85,2974.35 2119.85,2967.99 2128.84,2959 2139.07,2959 2224.5,2873.57 2224.5,2844.61 2229.5,2839.61 2229.5,2370.5 ; v1(2096,1768) 2111,1783 v1(2111,2041) ; v1(2142,2347) 2142,2362.62 2149.38,2370 2229.5,2370
IO10: H1.14 U1.T5 | length 3595.4
  Top Layer w7: v1(1467,1367) 1467,1353 1495,1325 1587,1325 1603.5,1341.5 1603.5,1388 1625,1409.5 1625,1563.54 U1.T5@1609.02,1579.53
  MidLayer1 w7: v1(557,1594) 557,1442.97 632.97,1367 v1(1467,1367) ; v1(962,3075) 976.57,3075 1157,3255.43 1157,3358 H1.14@1115,3400
  MidLayer2 w7: v1(557,1594) 557,1857 609,1909 609,2722 v1(962,3075)
IO11: H1.13 U1.P5 | length 3264.6
  Top Layer w7: U1.P5@1609.02,1642.52 v1(1624.76,1626.77)
  MidLayer2 w7: v1(535,1683) 535,1863 561,1889 561,2702 1115,3256 H1.13@1115,3300
  Bottom Layer w7: v1(535,1683) 615,1683 884,1414 1533,1414 1562,1443 1604.53,1443 1624.76,1463.24 v1(1624.76,1626.77)
IO12: H1.12 U1.R5 | length 3428.8
  Top Layer w7: U1.R5@1609.02,1611.02 v3(1624.76,1595.28)
  MidLayer1 w7: v1(496,1655) 496,1633 503,1626 557.33,1626 758.33,1425 1598.53,1425 1624.76,1451.24 v3(1624.76,1595.28) ; v1(986,3207) 1010.75,3207 1063.5,3259.75 1063.5,3351.5 H1.12@1015,3400
  MidLayer2 w7: v1(496,1655) 496,2082.69 505,2091.69 505,2726 v1(986,3207)
IO13: H1.11 U1.P6 | length 3357.1
  Top Layer w7: U1.P6@1640.51,1642.52 v1(1656.26,1626.77)
  MidLayer2 w7: v1(471.5,1675.5) 471.5,2076.58 492,2097.08 492,2739 1015,3262 H1.11@1015,3300
  Bottom Layer w7: v1(471.5,1675.5) 502.83,1675.5 520.33,1658 612,1658 868,1402 1551.5,1402 1575,1425.5 1615.5,1425.5 1656.26,1466.26 v1(1656.26,1626.77)
IO14: H1.10 JP5.4 U1.L17 | length 5490.5
  Top Layer w7: U1.L17@1988.97,1739.01 v1@2245,1739
  MidLayer1 w7: v1(865,3203) 897,3203 962,3268 962,3353 H1.10@915,3400
  MidLayer2 w7: v1(865,3203) 453,2791 453,2113.23 387.69,2047.92 387.69,1329.69 516.38,1201 1910.38,1201 1984.38,1127 2416,1127 JP5.4@2527,1238
  Bottom Layer w7: v1(2245,1740.01) 2245,1567 2527,1285 JP5.4@2527,1238
IO15: H1.9 JP5.5 U1.K17 | length 5612
  Top Layer w7: U1.K17@1986.97,1768.5 2004.46,1786 2110.5,1786 2123,1773.5 2143.83,1773.5 2163.33,1754 2227.5,1754 v1@2242,1768.5
  MidLayer2 w7: H1.9@915,3300 915,3277.2 440,2802.2 440,2118.62 374.69,2053.31 374.69,1324.31 547.5,1151.5 1716,1151.5 1747,1182.5 1910.5,1182.5 1987,1106 2495,1106 JP5.5@2627,1238
  Bottom Layer w7: v1@2242,1768.5 2272.5,1768.5 2272.5,1592.5 JP5.5@2627,1238
  other v1: 2245,1766.5
IO16: H1.8 U1.J17 | length 3010.2
  Top Layer w7: U1.J17@1986.97,1800 2122,1800 v1(2130,1792) ; v1(2100,2328) 2100,2281 2152,2229 v1(2152,2041)
  MidLayer2 w7: v1(2100,2328) 2124.5,2352.5 2124.5,2363.5 2144,2383 2215,2383 2217.5,2385.5 2217.5,2834.64 2212.5,2839.64 2212.5,2868.6 2134.1,2947 2123.87,2947 v1(2103.35,2967.52) ; v1(2130,1792) 2130,2019 v1(2152,2041)
  Bottom Layer w7: H1.8@815,3400 865,3350 865,3268.86 1021.86,3112 1955.91,3112 v1@2101.87,2966.04
IO17: H1.7 U1.K15 | length 3276.7
  Top Layer w7: U1.K15@1923.98,1768.5 v1(1939.72,1784.25) ; v1(2097,2367) 2199,2367 2257,2309 2257,2189 2315,2131 v1(2315,2102)
  MidLayer2 w7: v1@2076.36,2958.09 2104.8,2929.65 2132.26,2929.65 2200.5,2861.42 2200.5,2834.67 2205.5,2829.67 2205.5,2396 2126,2396 v1(2097,2367) ; v1(2198.5,1773.5) 2220.83,1773.5 2264,1816.67 2264,1963 2315,2014 v1(2315,2102)
  Bottom Layer w7: H1.7@815,3300 1036,3079 1969.47,3079 2065.62,2982.85 2065.62,2982.61 2078.03,2970.2 2076.77,2968.95 v1(2076.77,2958.51) ; v1(1939.72,1784.25) 1962.98,1761 1985,1761 2011.7,1787.7 2108.8,1787.7 2123,1773.5 v1(2198.5,1773.5)
IO18: H1.6 U1.H17 | length 3665.3
  Top Layer w7: U1.H17@1986.97,1831.5 2357.5,1831.5 ; 2358.5,1831.5 2506.5,1831.5 v1(2518,1820)
  MidLayer1 w7: H1.6@715,3400 744.13,3429.13 1162,3429.13 1162,3373.43 1204.72,3330.71 1242.29,3330.71 1254.03,3318.97 1254.03,3254.97 1466.68,3042.32 2138.68,3042.32 2342,2839 2337,2834 v1(2337,2827.57) ; v1(2345.85,2632) 2411,2632 2518,2525 v1(2518,1820)
  Bottom Layer w7: v1(2337,2827.57) 2337,2834 2301,2798 2301,2676.85 v1(2345.85,2632)
IO19: H1.5 U1.J15 | length 3174.4
  Top Layer w7: U1.J15@1923.98,1800 v3(1939.72,1815.75)
  MidLayer1 w7: v3(1939.72,1815.75) 2270.75,1815.75 2324,1869 2324,1947 2189,2082 v1(2189,2490)
  MidLayer2 w7: v1(2052.17,2948.82) 2052.17,2951.24 2112,2891.4 2112,2567 v1(2189,2490)
  Bottom Layer w7: H1.5@715,3300 715,3218 885,3048 1983.5,3048 2052.17,2979.33 v1(2052.17,2948.82)
IO20: H1.4 U1.U5 | length 3320.3
  Top Layer w7: v1(338,2240) 338,1883.59 449.5,1772.09 449.5,1642 515,1576.5 515,1554 v1(632,1437) ; v1(1590,1406) 1609.02,1425.02 U1.U5@1609.02,1548.03
  MidLayer1 w7: v1(550,3196) 568,3214 568,3353 H1.4@615,3400
  MidLayer2 w7: v1(338,2240) 338,2984 v1(550,3196) ; v1(632,1437) 663,1406 v1(1590,1406)
IO21: H1.3 U1.U6 | length 3488.3
  Top Layer w7: v1(269,1548) 346.5,1548 507,1387.5 v1(649,1387.5) ; v1(1631,1387.5) 1640.51,1397.01 U1.U6@1640.51,1548.03
  MidLayer2 w7: v1(269,1548) 269,2938.33 543.17,3212.5 ; 543.21,3212.5 615,3284.29 H1.3@615,3300 ; v1(649,1387.5) v1(1631,1387.5)
IO23: C112.1 FB5.1 H1.1 J22.1 JP5.3 U7.3 U7.11 U7.12 | length 6355.8
  Top Layer w12: H1.1@515,3300 457,3242 457,1823 653.5,1626.5 653.5,1541.5 1138,1057 2246,1057 ; v1(1600.02,553) U7.3@1600.02,606.81 ; U7.12@1753.57,833.19 U7.11@1779.16,833.19 v1(1779.16,887) ; v1(1849.41,973.41) 1849.41,1056.41 ; J22.1@2250,504 2250,1061 JP5.3@2427,1238 ; v2(2526,617) 2584.57,558.43 C112.1@2647,558.43 2647,617 2718,688 FB5.1@2822.41,688
  MidLayer1 w12: v1(1600.02,553) 1600.02,636 1738,636 1779.16,677.16 v1(1779.16,887)
  Bottom Layer w12: v1(1779.16,887) 1779.16,903.16 v1(1849.41,973.41) ; JP5.3@2427,1238 2427,1008 2526,909 v2(2526,617)
IO24: H2.24 U1.T3 | length 5308.4
  Top Layer w7: U1.T3@1546.02,1579.53 1561.41,1564.14 1561.41,1490 1547,1475.59 v1(1547,1365)
  MidLayer1 w7: H2.24@1615,3600 1655.5,3559.5 1655.5,3379.93 1718.74,3316.7 2154.03,3316.7 2154.03,3194.97 2252.5,3096.5 2963,3096.5 v1(2963,3181)
  MidLayer2 w7: v1(1547,1365) 1547,1259.5 1592,1214.5 1921.17,1214.5 1978.67,1157 2410,1157 2488,1235 2488,1330 2922.5,1764.5 2922.5,3140.5 v1(2963,3181)
IO25: H2.23 U1.T4 | length 4513.8
  Top Layer w7: v1(1321,1509) 1321,1428 1362,1387 1475,1387 1522,1340 1567,1340 1567,1434 1593,1460 1593,1564.05 U1.T4@1577.52,1579.53
  MidLayer2 w7: v1(1321,1509) 1321,1685 1182,1824 1182,1936 1384.91,1936 1498.91,2050 2095.25,2050 2108.22,2062.97 2129,2062.97 2199.03,2133 2513,2133 2513,2861.04 2449.5,2924.54 2449.5,2937.81 2432.81,2954.5 2432.07,2954.5 2223.57,3163 2219.7,3163 2189.76,3192.94 2052.8,3192.94 2011.19,3234.55 1898.32,3234.55 1875,3257.87 1875,3425.2 1689.8,3425.2 H2.23@1615,3500
IO26: H2.22 U1.U3 | length 4407.7
  Top Layer w7: v1@1525,1476 1546.02,1497.02 U1.U3@1546.02,1548.03
  MidLayer2 w7: H2.22@1515,3600 1574,3541 1574,3260.65 1604.33,3230.31 1865.16,3230.31 1884.92,3210.55 2001.25,3210.55 2042.86,3168.94 2179.82,3168.94 2209.76,3139 2213.63,3139 2409.5,2943.13 2409.5,2937.83 2404.5,2932.83 2404.5,2919.17 2414.17,2909.5 2430.6,2909.5 2488,2852.1 2488,2159 2159,2159 2111,2111 2085,2111 2037,2063 1493.52,2063 1379.52,1949 1163,1949 1163,1819 1299.5,1682.5 1299.5,1478.5 1299,1478 v1(1525,1478)
IO27: H2.21 U1.U4 | length 4410.8
  Top Layer w7: v1(1566.52,1461) 1577.52,1472 U1.U4@1577.52,1548.03
  MidLayer2 w7: H2.21@1515,3500 1515,3481.06 1561,3435.06 1561,3250.02 1596.46,3214.57 1857,3214.57 1873.01,3198.55 1996.28,3198.55 2037.89,3156.94 2174.85,3156.94 2204.79,3127 2208.66,3127 2395.18,2940.48 2392.5,2937.81 2392.5,2914.19 2409.19,2897.5 2425.63,2897.5 2476,2847.13 2476,2172 2153.62,2172 2115.62,2134 2083,2134 2025,2076 1477,2076 1363,1962 1143,1962 1143,1764 1243,1664 1243,1484.5 1267,1460.5 1566.02,1460.5 v1(1566.52,1461) v1@1567.52,1462
IO28: H2.20 U1.A16 | length 2877.1
  Top Layer w7: U1.A16@1955.47,2051.97 1955.47,2262 v1(1963.47,2270)
  MidLayer2 w7: H2.20@1415,3600 1474,3541 1474,3218.91 1520.65,3172.26 1521.73,3173.34 1554.72,3173.34 1562.18,3165.88 1820.55,3165.88 1823.88,3162.55 1981.36,3162.55 2028.91,3115.01 2040.82,3115.01 2041.84,3116.02 2164.86,3116.02 2189.88,3091 2193.75,3091 2356.5,2928.25 2356.5,2899.28 2394.28,2861.5 2404.06,2861.5 2438,2827.56 2438,2226.5 2308,2226.5 2293.75,2212.25 2021.22,2212.25 v1(1963.47,2270)
IO29: H2.19 U1.L14 | length 3042
  Top Layer w7: U1.L14@1892.48,1737.01 v1(1908.23,1752.76)
  MidLayer1 w7: v1(1837.24,1752.76) 1845.5,1761.01 1845.5,1941.5 1971,2067 1971,2139 v1(2072.5,2240.5)
  MidLayer2 w7: H2.19@1415,3500 1415,3478.7 1460,3433.7 1460,3209.29 1480.5,3188.79 1487.16,3188.79 1520.65,3155.29 1526.7,3161.34 1540.37,3161.34 1547.83,3153.88 1815.58,3153.88 1818.91,3150.55 1976.39,3150.55 2023.94,3103.01 2045.8,3103.01 2046.81,3104.02 2159.89,3104.02 2184.91,3079 2188.78,3079 2344.5,2923.28 2344.5,2894.31 2389.31,2849.5 2399.09,2849.5 2404.5,2844.09 2404.5,2240.5 v1(2072.5,2240.5)
  Bottom Layer w7: v1(1837.24,1752.76) v1(1908.23,1752.76)
IO30: H2.18 U1.B11 | length 2846.3
  Top Layer w7: U1.B11@1797.99,2020.47 1814,2036.48 1814,2176 v1(1833,2195) v1@1830,2195
  MidLayer2 w7: H2.18@1315,3600 1375,3540 1375,3254.92 1465.59,3164.33 1476.37,3164.33 1493.07,3147.63 1493.07,3136.85 1513.58,3116.34 1545.34,3116.34 1546.89,3117.88 1800.67,3117.88 1804,3114.55 1961.48,3114.55 2009.03,3067.01 2060.71,3067.01 2061.72,3068.02 2144.97,3068.02 2169.99,3043 2173.87,3043 2308.5,2908.37 2308.5,2879.4 2364,2823.9 2364,2317 2335,2288 1926,2288 v1(1833,2195) v1@1830,2195
IO31: H2.17 U1.T17 | length 3049.9
  Top Layer w7: U1.T17@1986.97,1579.53 2267.53,1579.53 v3(2298,1610)
  MidLayer1 w7: v3(2298,1610) 2298,1675 2389,1766 2389,2215 ; v1(2334,2334) 2334,2269 2388,2215
  MidLayer2 w7: H2.17@1315,3500 1356,3459 1356,3254.24 1457.91,3152.33 1471.4,3152.33 1481.07,3142.66 1481.07,3131.38 1508.1,3104.34 1550.31,3104.34 1551.86,3105.88 1795.7,3105.88 1799.03,3102.55 1956.51,3102.55 2004.06,3055.01 2065.68,3055.01 2066.69,3056.02 2140,3056.02 2165.02,3031 2168.9,3031 2296.5,2903.4 2296.5,2874.43 2320.5,2850.43 2320.5,2347.5 v1(2334,2334)
IO32: H2.16 U1.C11 | length 2824.4
  Top Layer w7: U1.C11@1797.99,1988.98 v3(1813.74,2004.72)
  MidLayer1 w7: v3(1813.74,2004.72) 1813.74,2201.74 v1(1836,2224)
  MidLayer2 w7: H2.16@1215,3600 1275,3540 1275,3256.5 1304,3227.5 1348.24,3227.5 1374.5,3201.24 1374.5,3184.56 1490.72,3068.34 1565.23,3068.34 1566.77,3069.88 1780.79,3069.88 1825.73,3024.94 1830.71,3024.94 1983.21,3024.94 1989.14,3019.01 2080.59,3019.01 2081.6,3020.02 2125.09,3020.02 2150.11,2995 2153.99,2995 2260.5,2888.49 2260.5,2859.52 2272,2848.02 2272,2309 2267,2304 1918.67,2304 1838.67,2224 v1(1836,2224)
IO33: H2.15 U1.P15 | length 3112.4
  Top Layer w7: U1.P15@1923.98,1642.52 v1@1939.72,1658.27
  MidLayer1 w7: v1(1800,1860) 1800,1728 1855.74,1672.26 1879.71,1672.26 1908.7,1643.27 1925.73,1643.27 v1(1939.72,1657.27) ; v1(2051,2157) 2124,2230 v1(2124,2324)
  MidLayer2 w7: H2.15@1215,3500 1261,3454 1261,3248 1293.5,3215.5 1343.27,3215.5 1362.5,3196.27 1362.5,3179.58 1485.75,3056.34 1570.2,3056.34 1571.74,3057.88 1775.82,3057.88 1820.76,3012.94 1978.24,3012.94 1984.17,3007.01 2085.56,3007.01 2086.57,3008.02 2120.12,3008.02 2145.14,2983 2149.02,2983 2248.5,2883.52 2248.5,2854.55 2259.5,2843.55 2259.5,2324.5 2259,2324 v1(2124,2324)
  Bottom Layer w7: v1(1800,1860) 1800,1873 1869,1942 1869,2075 1951,2157 v1(2051,2157)
IO34: H2.14 U1.R11 | length 4048.7
  Top Layer w7: U1.R11@1797.99,1611.02 v3(1813.74,1595.28)
  MidLayer1 w7: v1(605,1325) 615.5,1314.5 1665.07,1314.5 1665.57,1314 1805,1314 1813.74,1322.74 v3(1813.74,1595.28)
  MidLayer2 w7: v1@605,1630 v1(605,1631) 605,1844 684,1923 684,2489 785,2590 785,2632 1175,3022 1175,3540 H2.14@1115,3600
  Bottom Layer w7: v1(605,1325) v1(605,1631)
IO35: H2.13 U1.R12 | length 4184.8
  Top Layer w7: U1.R12@1829.49,1611.02 v3(1845.24,1595.28)
  MidLayer1 w7: v1(581,1220) 1817,1220 1852,1255 1852,1588.51 v3(1845.24,1595.28)
  MidLayer2 w7: v1(581,1632) 581,1854 656.5,1929.5 656.5,2713 1154.5,3211 1154.5,3460.5 H2.13@1115,3500
  Bottom Layer w7: v1(581,1220) v1(581,1632)
IO36: H2.12 JP1.7 U1.T10 | length 4586
  Top Layer w7: JP1.7@155,1173.16 v1(198,1173.16) ; v1(1761,1348) 1782,1369 1782,1564.02 U1.T10@1766.5,1579.53
  MidLayer2 w7: v1(538,1231) 538,1382 633,1477 ; H2.12@1015,3600 1075.97,3539.03 1075.97,3244.97 535.5,2704.5 535.5,2005.75 517,1987.25 517,1593 633,1477 ; v1(1761,1348) 1738.5,1348 1720,1366.5 1720,1431 679,1431 633,1477
  Bottom Layer w7: v1(198,1173.16) 255.84,1231 v1(538,1231)
IO37: H2.11 JP1.3 RM1.1 U1.P13 | length 4348.9
  Top Layer w7: JP1.3@155,1346.39 85.61,1346.39 85.61,1545.61 239.63,1699.63 RM1.1@295,1699.63 295.37,1700 v1(417,1700) ; U1.P13@1860.98,1642.52 v1(1876.73,1626.77)
  MidLayer2 w7: v1(518,2054) 518,2714.25 1054.5,3250.75 1054.5,3460.5 H2.11@1015,3500
  Bottom Layer w7: v1(417,1700) 480,1763 716,1763 ; v1(518,2054) 518,1961 716,1763 ; v1(1876.73,1626.77) 1783.5,1720 1673,1720 1673,1743.19 1671.51,1744.68 1671.51,1754.49 1653.75,1772.25 1601,1772.25 1592.75,1764 1556,1764 1534.74,1785.26 1317,1785.26 1272.74,1741 738,1741 716,1763
IO38: H2.10 JP1.5 U1.T11 | length 4576.5
  Top Layer w7: JP1.5@155,1259.77 v1(207,1259.77) ; U1.T11@1797.99,1579.53 1814,1563.52 v1(1814,1282)
  MidLayer1 w7: v1(501,1260) 1792,1260 v1(1814,1282)
  MidLayer2 w7: v1(501,1260) 450,1311 450,2073.46 479,2102.46 479,2751 975.97,3247.97 975.97,3539.03 H2.10@915,3600
  Bottom Layer w7: v1(207,1259.77) v1@501,1259.77
IO39: H2.9 JP1.8 U1.P14 | length 4752.7
  Top Layer w7: JP1.8@155,1129.85 v1(198,1129.85) ; U1.P14@1892.48,1642.52 v3(1908.23,1626.77)
  MidLayer1 w7: v1(558,1294) 513,1294 394,1413 394,1730 v1(417,1753) 460,1710 471.53,1710 522.53,1659 653,1659 756.09,1555.91 1493.91,1555.91 1538,1600 1572,1600 1627,1655 1880,1655 v3(1908.23,1626.77)
  MidLayer2 w7: v1(417,1753) 417,2058.85 466,2107.85 466,2765.21 956,3255.21 956,3459 H2.9@915,3500
  Bottom Layer w7: v1(198,1129.85) 266.85,1129.85 288,1151 558,1151 v1(558,1294)
IO40: H2.8 JP1.1 U1.R13 | length 5013.6
  Top Layer w7: v1(108,1433) JP1.1@155,1433 ; U1.R13@1860.98,1611.02 v1(1876.73,1595.28)
  MidLayer1 w7: v1(108,1433) 230,1433 v1(466,1197) 1824,1197 1864,1237 1864,1290 1908.09,1334.09 1908.09,1563.91 v1(1876.73,1595.28)
  MidLayer2 w7: v1(466,1197) 361.69,1301.31 361.69,2058.69 427,2124 427,2808.89 875.97,3257.86 875.97,3539.03 H2.8@815,3600